# Altium PCB FRONT-UNIT-3.2-WIDE.PcbDoc
Units mm, origin at the board's own origin, x right, y up, seen from the top; angles counter-clockwise.
Board outline 200 x 77.14 mm, 2 copper layers (Top Layer, Top, Bottom Layer, Bottom); 97 components, 83 nets, 412 pads, 119 vias.
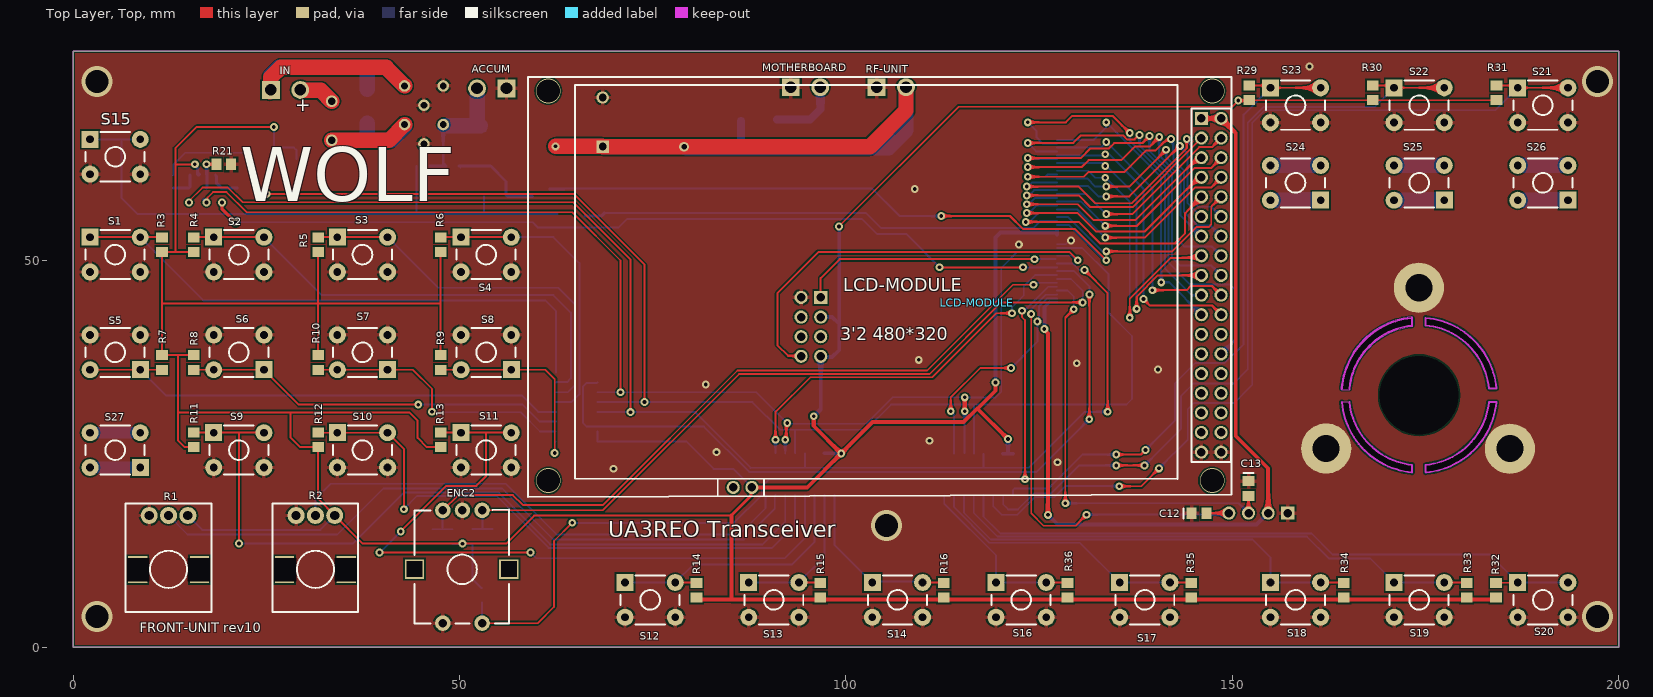
[diagram p0: Top Layer, Top view]
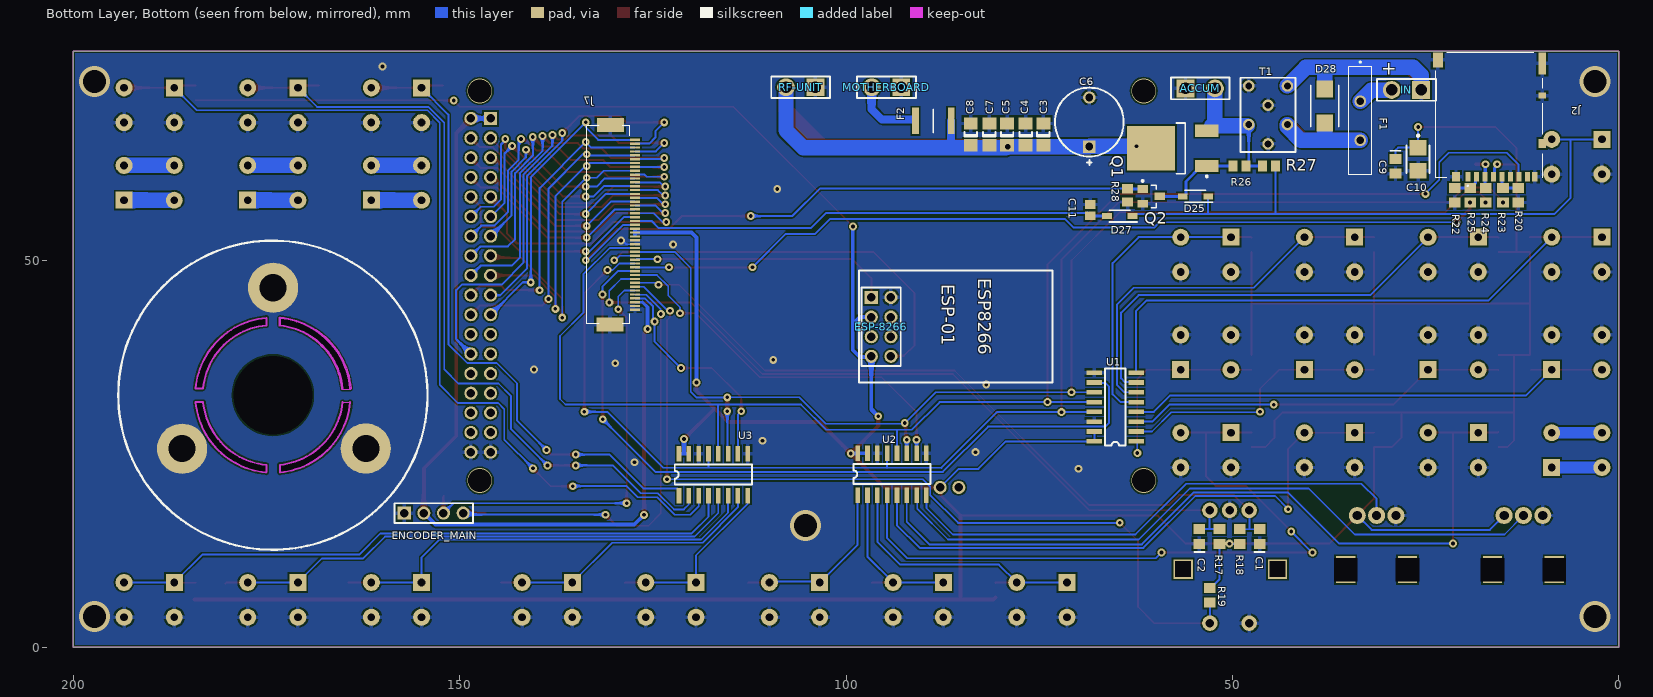
[diagram p1: Bottom Layer, Bottom view, seen from below]

## Layer stack, top to bottom
Top Solder, Top Mask: solder mask 0.0102, Solder Resist, Dk 3.5
Top Layer, Top: signal copper 0.0356
Dielectric 1: dielectric 0.32, FR-4, Dk 4.8
Bottom Layer, Bottom: signal copper 0.0356
Bottom Solder, Bot Mask: solder mask 0.0102, Solder Resist, Dk 3.5

## Board outline
0,0 0,75.757 0,77.141 200,77.141 200,0
cut-out: 175.014,22.629 ccw(c174.15,32.625) 184.143,31.726 184.125,31.725 183.175,31.725 cw(c174.15,32.625) 175.023,23.597 175,23.6
cut-out: 164.154,31.723 ccw(c174.15,32.625) 173.244,22.629 173.25,22.65 173.25,23.6 173.248,23.609 cw(c174.15,32.625) 165.135,31.714 165.125,31.725
cut-out: 164.113,33.381 ccw(c164.2,33.475) 164.2,33.347 165.125,33.347 ccw(c165.125,33.475) 165.252,33.475 ccw(c165.125,33.475) 165.252,33.476 ccw(c165.127,33.497) 165.254,33.485 cw(c174.15,32.625) 173.217,41.514 ccw(c173.204,41.641) 173.321,41.591 ccw(c173.225,41.675) 173.352,41.675 173.352,42.6 ccw(c173.225,42.6) 173.281,42.714 ccw(c173.204,42.613) 173.192,42.74 ccw(c174.15,32.625) 164.029,33.513 ccw(c164.155,33.502)
cut-out: 174.999,41.661 cw(c174.15,32.625) 183.184,33.494 183.2,33.475 184.15,33.475 184.151,33.473 ccw(c174.15,32.625) 175.004,42.625 175,42.6

## Design rules (kind name [scope] priority, off if disabled: settings)
BoardOutlineClearance [All] p1: gap=0.2 ignorepadtopadclearanceinfootprint=FALSE except(0.4: Arc-SplitBarrior Arc-SplitContinuation Track-SplitBarrior Track-SplitContinuation SMDPad-SplitBarrior SMDPad-SplitContinuation THPad-SplitBarrior THPad-SplitContinuation Via-SplitBarrior Via-SplitContinuation Fill-SplitBarrior Fill-SplitContinuation Poly-SplitBarrior Poly-SplitContinuation Region-SplitBarrior Region-SplitContinuation Text-SplitBarrior Text-SplitContinuation)
Clearance Zazor [InNetClass('Zazor')] p1: gap=0.6 ignorepadtopadclearanceinfootprint=FALSE
Clearance "Clearance Bottom Layer" [OnLayer('Bottom Layer')] p2: gap=0.2 ignorepadtopadclearanceinfootprint=TRUE
Clearance "Clearance Top Layer" [OnLayer('Top Layer')] p3: gap=0.203 ignorepadtopadclearanceinfootprint=TRUE except(0.254: Arc-Text Track-Text SMDPad-Text THPad-Text Via-Text Fill-Text Poly-Text Region-Text Text-Text)
Clearance [All] p4: gap=0.2 ignorepadtopadclearanceinfootprint=FALSE except(0.089: Arc-Arc Arc-Track Arc-SMDPad Track-Track Track-SMDPad SMDPad-SMDPad; 0.127: Arc-Via Track-Via SMDPad-Via THPad-Via Via-Via; 0.254: Arc-Text Track-Text SMDPad-Text THPad-Text Via-Text Fill-Text Poly-Text Region-Text Text-Text)
ComponentClearance [All] p1: gap=0 collisioncheckmode=3 verticalgap=0 showdistances=FALSE
HoleSize [All] p1: absolutevalues=TRUE maxlimit=21 minlimit=0.486 maxpercent=80.000 minpercent=20.000
MinimumAnnularRing [All] p1: minimumring=0.076
MinimumSolderMaskSliver [All] p1: minsoldermaskwidth=0.01
PolygonConnect PolygonConnect_1 [All] p1: thpad.connectstyle=Relief thpad.reliefconductorwidth=0.508 thpad.reliefentries=4 thpad.polygonreliefangle="90 Angle" thpad.airgapwidth=0.254 smdpad.connectstyle=Relief smdpad.reliefconductorwidth=0.508 smdpad.reliefentries=4 smdpad.polygonreliefangle="90 Angle" smdpad.airgapwidth=0.254 via.connectstyle=Direct via.reliefconductorwidth=0.508 via.reliefentries=4 via.polygonreliefangle="90 Angle" via.airgapwidth=0.254
RoomDefinition FRONT-UNIT-WIDE [InComponentClass('FRONT-UNIT-WIDE')] p1: confinementstyle=ConfineIn formatcopy=TRUE lockcomponents=FALSE outline 0,-1.25 199.694,-1.25 199.694,76.835 0,76.835
RoutingCorners [All] p1: cornerstyle=Round minsetback=2.54 maxsetback=2.54
RoutingVias [All] p1: holewidth=0.5 width=1 viastyle="Through Hole" minholewidth=0.2 minwidth=0.45 maxholewidth=1 maxwidth=2
SilkToSilkClearance [All] p1: silktosilkclearance=0.01
SilkToSolderMaskClearance [IsPad] p1: minsilkscreentomaskgap=0.1 clearancetoexposedcopper=TRUE
SolderMaskExpansion [All] p1: expansion=0.102
Width [All] p1: maxlimit=2.54 minlimit=0.15 preferedwidth=0.4
24 further rules are at their usual default settings.

## Components (designator, comment, footprint, x,y, rotation, side; value= is the part's Value field where it differs from the comment)
ACCUM "JX2" JX2 54.165,72.315 r180 bottom value=13.8V
C1 "100n" CAP_0805 46.485,14.13 r90 bottom
C2 "100n" CAP_0805 54.273,14.13 r90 bottom
C3 "1uF" CAP_1206 74.459,66.37 r90 bottom
C4 "100n" CAP_1206 76.759,66.37 r90 bottom
C5 "1n" CAP_1206 79.159,66.37 r90 bottom
C6 "1000uF" CAP250RP 68.516,67.418 r90 bottom
C7 "470pF" CAP_1206 81.459,66.37 r90 bottom
C8 "120pF" CAP_1206 83.859,66.37 r90 bottom
C9 "100n" CAP_0805 28.906,62.45 r270 bottom
C10 "22uF" EEEFC_sizeB 25.975,63.55 r270 bottom
C11 "8.2n" CAPC2013X94X50LL20T25 68.389,56.567 r270 bottom
C12 "10n" CAP_0805 145.478,17.324 r0 top
C13 "10n" CAP_0805 152.082,20.753 r270 top
D25 "1n4148w" SOD3716X135N 54.8,58.345 r0 bottom
D27 "1n4148w" SOD3716X135N 64.579,55.805 r0 bottom
D28 "SM6T15A" SMBJ36CATR 38.036,70.029 r90 bottom
ENC2 "PEC12" PEC12 50.275,10.425 r0 top
ENCODER_MAIN "OPTICAL ENCODER" 644456-4 153.349,18.005 r180 bottom
ESP-8266 "ESP-01 ESP8266" "ESP-01 ESP8266" 85.788,41.51 r270 bottom
F1 "RUEF400" RUEF400 33.464,68.124 r270 bottom
F2 "MF-MSMF110_16-2" FUSC4632X85N 88.709,68.124 r0 bottom
IN "JX2" JX2 27.495,72.117 r0 bottom value=13.8V
J2 "DM3AT-SF-PEJM5" DM3ATSFPEJM5 16.75,68.3 r0 bottom
J7 "FPC-45P-0.5mm" FH12S45S05SH60 127.952,54.662 r90 bottom
LCD-MODULE "ILI9481 480*320 3'2" LCD-MODULE-3.2-480-320 59.88,73.77 r0 top
MOTHERBOARD "JX2" JX2 94.764,72.47 r0 bottom value=13.8V
Q1 "IRFR9024NPBF" ONSC-DPAK-3-369C-01_V 57.721,64.568 r0 bottom
Q2 "BSS123" FAIR-SOT23-3_V 60.515,58.345 r270 bottom
R1 "ptv09a-4225f-b102" PTV09 12.334,11.591 r180 top value="AF GAIN 1k"
R2 "ptv09a-4225f-b102" PTV09 31.332,11.591 r180 top value="SHIFT 1k"
R3 "4.7k" RES_0805 11.5,52.1 r270 top
R4 "4.7k" RES_0805 15.594,52.1 r270 top
R5 "4.7k" RES_0805 31.696,52.1 r270 top
R6 "4.7k" RES_0805 47.549,52.1 r270 top
R7 "4.7k" RES_0805 11.5,36.857 r90 top
R8 "4.7k" RES_0805 15.594,36.857 r90 top
R9 "4.7k" RES_0805 47.549,36.857 r90 top
R10 "4.7k" RES_0805 31.696,36.857 r90 top
R11 "4.7k" RES_0805 15.594,26.85 r270 top
R12 "4.7k" RES_0805 31.696,26.85 r270 top
R13 "4.7k" RES_0805 47.549,26.85 r270 top
R14 "4.7k" RES_0805 80.659,7.4 r270 top
R15 "4.7k" RES_0805 96.659,7.4 r270 top
R16 "4.7k" RES_0805 112.659,7.4 r270 top
R17 "4.7k" RES_0805 51.677,14.33 r270 bottom
R18 "4.7k" RES_0805 49.081,14.331 r270 bottom
R19 "4.7k" RES_0805 52.921,6.741 r90 bottom
R20 "3.3k" RES_0805 13,58.5 r90 bottom
R21 "3.3k" RES_0805 19.5,62.5 r180 top
R22 "3.3k" RES_0805 21.25,58.5 r90 bottom
R23 "0" RES_0805 15,58.5 r270 bottom
R24 "0" RES_0805 17.25,58.5 r270 bottom
R25 "0" RES_0805 19.25,58.5 r270 bottom
R26 "30k" RESC2013X60X40NL20T25 49.085,62.282 r180 bottom
R27 "30k" RESC2013X60X40NL20T25 45.275,62.282 r0 bottom
R28 "30k" RESC2013X60X40NL20T25 63.563,58.472 r90 bottom
R29 "4.7k" RES_0805 152.159,71.741 r270 top
R30 "4.7k" RES_0805 168.159,71.741 r270 top
R31 "4.7k" RES_0805 184.159,71.741 r270 top
R32 "4.7k" RES_0805 184.1,7.4 r270 top
R33 "4.7k" RES_0805 180.3,7.4 r270 top
R34 "4.7k" RES_0805 164.4,7.4 r270 top
R35 "4.7k" RES_0805 144.659,7.4 r270 top
R36 "4.7k" RES_0805 128.659,7.4 r270 top
RF-UNIT "JX2" JX2 105.859,72.47 r0 bottom value=13.8V
S1 "PTS645SK50LFS" PTS645SK50LFS 5.441,50.816 r0 top
S2 "PTS645SK50LFS" PTS645SK50LFS 21.441,50.816 r0 top
S3 "PTS645SK50LFS" PTS645SK50LFS 37.441,50.816 r0 top
S4 "PTS645SK50LFS" PTS645SK50LFS 53.441,50.816 r0 top
S5 "PTS645SK50LFS" PTS645SK50LFS 5.441,38.166 r180 top
S6 "PTS645SK50LFS" PTS645SK50LFS 21.441,38.166 r180 top
S7 "PTS645SK50LFS" PTS645SK50LFS 37.441,38.166 r180 top
S8 "PTS645SK50LFS" PTS645SK50LFS 53.441,38.166 r180 top
S9 "PTS645SK50LFS" PTS645SK50LFS 21.441,25.515 r0 top
S10 "PTS645SK50LFS" PTS645SK50LFS 37.441,25.515 r0 top
S11 "PTS645SK50LFS" PTS645SK50LFS 53.441,25.515 r0 top
S12 "PTS645SK50LFS" PTS645SK50LFS 74.659,6.141 r0 top
S13 "PTS645SK50LFS" PTS645SK50LFS 90.659,6.141 r0 top
S14 "PTS645SK50LFS" PTS645SK50LFS 106.659,6.141 r0 top
S15 "PTS645SK50LFS" PTS645SK50LFS 5.442,63.475 r0 top value=PWR
S16 "PTS645SK50LFS" PTS645SK50LFS 122.659,6.141 r0 top
S17 "PTS645SK50LFS" PTS645SK50LFS 138.659,6.141 r0 top
S18 "PTS645SK50LFS" PTS645SK50LFS 158.159,6.141 r0 top
S19 "PTS645SK50LFS" PTS645SK50LFS 174.159,6.141 r0 top
S20 "PTS645SK50LFS" PTS645SK50LFS 190.159,6.141 r0 top
S21 "PTS645SK50LFS" PTS645SK50LFS 190.159,70.141 r0 top
S22 "PTS645SK50LFS" PTS645SK50LFS 174.159,70.141 r0 top
S23 "PTS645SK50LFS" PTS645SK50LFS 158.159,70.141 r0 top
S24 "PTS645SK50LFS" PTS645SK50LFS 158.159,60.1 r180 top
S25 "PTS645SK50LFS" PTS645SK50LFS 174.159,60.1 r180 top
S26 "PTS645SK50LFS" PTS645SK50LFS 190.159,60.1 r180 top
S27 "PTS645SK50LFS" PTS645SK50LFS 5.442,25.515 r180 top
T1 "BNX016-01" TRANSF_ICORE 45.402,68.886 r270 bottom
U1 "MCP3008-I/SL" MCP3008-I/SL 65.159,31.096 r0 bottom
U2 "MCP3008-I/SL" MCP3008-I/SL 94.043,22.404 r90 bottom
U3 "MCP3008-I/SL" MCP3008-I/SL 117.159,22.341 r90 bottom

## Footprints (in the part's own frame and the unit in brackets; to place one, negate y for a bottom-side part, rotate by r counter-clockwise, add the part's x,y. Pads: shape width x height; smd on the part's side, far side on the other; paste and mask are expansions set on the pad)
644456-4 [mm]
  rect 1.7x1.7 hole 1.1: 1(-3.81,-0.635)
  round 1.7 hole 1.1: 2(-1.27,-0.635) 3(1.27,-0.635) 4(3.81,-0.635)
  silkscreen extent -5.08,-1.9 5.08,0.64
CAP250RP [mm]
  rect 1.6x1.6 hole 1: 1(-2.631,0)
  round 1.6 hole 1: 2(3.719,0)
  silkscreen extent -4.99,-4.45 4.99,4.45
CAP_0805 [mm]
  rect 1.3x1.5 smd: 1(-0.75,0) 2(1.15,0)
  silkscreen extent -1.8,-0.65 -1.8,0.65
CAP_1206 [mm]
  rect 1.6x1.8 smd: 1(-1.4,0) 2(1.4,0)
  silkscreen extent -0.3,-0.8 0.3,0.8
CAPC2013X94X50LL20T25 [mm] "Chip Capacitor, 2-Leads, Body 2.01x1.25mm, IPC High Density"
  rect 1.15x1.35 smd: 1(-0.725,0) 2(0.725,0)
  body extent -1.1,-0.72 1.1,0.72, height 0.94
DM3ATSFPEJM5 [mm]
  rect 0.7x1.2 smd: 1(2.775,7.412) 2(1.675,7.412) 3(0.575,7.412) 4(-0.525,7.412) 5(-1.625,7.412) 6(-2.725,7.412) 7(-3.825,7.412) 8(-4.925,7.412) MP2(-5.875,7.412)
  rect 1x1.2 smd: MP1(4.325,7.412) MP3(-6.825,3.112)
  rect 1x0.8 smd: MP4(-6.825,-3.087)
  rect 1x2.8 smd: MP5(-6.825,-7.237)
  rect 1.3x1.9 smd: MP6(6.675,-7.688)
  silkscreen extent -6.93,-8.64 6.93,8.64, body extent -7.24,-8.64 7.19,7.94, height 1.93
EEEFC_sizeB [mm]
  rect 2x2.2 smd: 1(-1.1,0) 2(1.9,0)
  silkscreen extent -2.9,-1.5 2.2,1.5
"ESP-01 ESP8266" [mm]
  round 1.7 hole 1.1: 1(-3.76,-8.4) 2(-1.22,-8.4) 3(1.32,-8.4) 4(3.86,-8.4) 6(-1.22,-10.94) 7(1.32,-10.94) 8(3.86,-10.94)
  rect 1.7x1.7 hole 1.1: 5(-3.76,-10.94)
  silkscreen extent -7.25,-12.5 7.25,12.5
FAIR-SOT23-3_V [mm] "SOT23, 3-Leads, Body 2.92x1.3mm, Pitch 0.95mm"
  rect 1x1.4 smd: 1(-0.95,-1.1) 2(0.95,-1.1) 3(0,1.1)
  silkscreen extent -2.12,-1.23 1.46,0.65, body extent -1.46,-0.65 1.46,0.65, height 1.2
FH12S45S05SH60 [mm]
  rect 0.3x1.3 smd: 1(11,-0.65) 2(10.5,-0.65) 3(10,-0.65) 4(9.5,-0.65) 5(9,-0.65) 6(8.5,-0.65) 7(8,-0.65) 8(7.5,-0.65) 9(7,-0.65) 10(6.5,-0.65) 11(6,-0.65) 12(5.5,-0.65) 13(5,-0.65) 14(4.5,-0.65) 15(4,-0.65) 16(3.5,-0.65) 17(3,-0.65) 18(2.5,-0.65) 19(2,-0.65) 20(1.5,-0.65) 21(1,-0.65) 22(0.5,-0.65) 23(0,-0.65) 24(-0.5,-0.65) 25(-1,-0.65) 26(-1.5,-0.65) 27(-2,-0.65) 28(-2.5,-0.65) 29(-3,-0.65) 30(-3.5,-0.65) 31(-4,-0.65) 32(-4.5,-0.65) 33(-5,-0.65) 34(-5.5,-0.65) 35(-6,-0.65) 36(-6.5,-0.65) 37(-7,-0.65) 38(-7.5,-0.65) 39(-8,-0.65) 40(-8.5,-0.65) 41(-9,-0.65) 42(-9.5,-0.65) 43(-10,-0.65) 44(-10.5,-0.65) 45(-11,-0.65)
  rect 1.8x3.5 smd: 46(-12.9,2.6) 47(12.9,2.54)
  silkscreen extent -12.8,0 12.8,5.6, body extent -13.62,-5.6 13.62,1.27, height 2.1
FUSC4632X85N [mm]
  rect 0.85x3.43 smd: 1(-2.3,0) 2(2.3,0)
  silkscreen extent 0,-1.52 0,1.52, body extent -2.27,-1.62 2.27,1.62, height 0.85
JX2 [mm]
  rect 2.3x2.3 hole 1.5: 1(-1.905,0)
  round 2.3 hole 1.5: 2(1.905,0)
  silkscreen extent -3.81,-1.4 3.81,1.4
LCD-MODULE-3.2-480-320 [mm]
  rect 1.7x1.7 hole 1.1: 1(86.106,-5.334)
  round 1.7 hole 1.1: 2(88.646,-5.334) 3(86.106,-7.874) 4(88.646,-7.874) 5(86.106,-10.414) 6(88.646,-10.414) 7(86.106,-12.954) 8(88.646,-12.954) 9(86.106,-15.494) 10(88.646,-15.494) 11(86.106,-18.034) 12(88.646,-18.034) 13(86.106,-20.574) 14(88.646,-20.574) 15(86.106,-23.114) 16(88.646,-23.114) 17(86.106,-25.654) 18(88.646,-25.654) 19(86.106,-28.194) 20(88.646,-28.194) 21(86.106,-30.734) 22(88.646,-30.734) 23(86.106,-33.274) 24(88.646,-33.274) 25(86.106,-35.814) 26(88.646,-35.814) 27(86.106,-38.354) 28(88.646,-38.354) 29(86.106,-40.894) 30(88.646,-40.894) 31(86.106,-43.434) 32(88.646,-43.434) 33(86.106,-45.974) 34(88.646,-45.974) 35(86.106,-48.514) 36(88.646,-48.514) 37(25.527,-53.086) 38(27.943,-53.086)
  silkscreen extent -1,-54.3 90,0
MCP3008-I/SL [mm]
  rect 2x0.6 smd: 1(-2.7,4.445) 2(-2.7,3.175) 3(-2.7,1.905) 4(-2.7,0.635) 5(-2.7,-0.635) 6(-2.7,-1.905) 7(-2.7,-3.175) 8(-2.7,-4.445) 9(2.7,-4.445) 10(2.7,-3.175) 11(2.7,-1.905) 12(2.7,-0.635) 13(2.7,0.635) 14(2.7,1.905) 15(2.7,3.175) 16(2.7,4.445)
  silkscreen extent -1.3,-5 1.3,5
ONSC-DPAK-3-369C-01_V [mm] "DPAK, 3-Leads, Body 6.54x6.095mm, Pitch 2.29mm"
  rect 3x1.6 smd: 1(-4.4,2.29) 3(-4.4,-2.29)
  rect 6.2x5.8 smd: 4(2.8,0)
  silkscreen extent -4.52,-3.27 -0.45,3.76, body extent -1.6,-3.27 4.49,3.27, height 2.38
PEC12 [mm]
  round 2 hole 1.1: 1(-2.44,-7.302) 2(2.64,-7.302) 3(2.64,7.302) 4(0.1,7.302) 5(-2.44,7.302)
  rect 2.5x2.5 hole 2 square: 6(-6.1,-0.318) 7(6.1,-0.318)
  silkscreen extent -6.12,-7.32 6.12,7.38
PTS645SK50LFS [mm]
  rect 2.2x2.2 hole 1: 1(-3.25,2.25)
  round 2.2 hole 1: 2(3.25,2.25) 3(3.25,-2.25) 4(-3.25,-2.25)
  silkscreen extent -3.81,-3.17 3.81,3.18
PTV09 [mm]
  round 2.2 hole 1.2: 1(-2.515,-5.465) 2(-0.015,-5.465) 3(2.485,-5.465)
  rect 2.5x3.5 hole 3 square: 4(-4.015,1.535) 5(3.985,1.535)
  silkscreen extent -5.56,-7.03 5.56,7.03
RES_0805 [mm]
  rect 1.3x1.5 smd: 1(-0.95,0) 2(0.95,0)
RESC2013X60X40NL20T25 [mm] "Chip Resistor, 2-Leads, Body 2.00x1.25mm, IPC Medium Density"
  rect 1.2x1.45 smd: 1(-0.85,0) 2(0.85,0)
  body extent -1.1,-0.72 1.1,0.72, height 0.6
RUEF400 [mm]
  round 1.515 hole 1.01: 1(-2.525,0) 2(2.525,0)
  silkscreen extent -7.7,-1.5 7,1.5, body extent -7,-1.5 7,1.5, height 19.1
SMBJ36CATR [mm]
  rect 2.2x2.15 smd: 1(-2.2,0) 2(2.2,0)
  silkscreen extent -2.68,-1.81 2.68,1.81, body extent -3.09,-1.81 3.09,1.81, height 2.75
SOD3716X135N [mm]
  rect 1.25x0.75 smd: 1(-1.65,0) 2(1.65,0)
  silkscreen extent -2.27,-0.77 1.35,0.77, body extent -1.85,-0.78 1.85,0.77, height 1.35
TRANSF_ICORE [mm]
  round 1.5 hole 0.9: LCG1(-1.25,0.01) LCG2(3.75,0.01) LCG3(-3.75,-2.49) LCP(1.25,-2.49) P(1.25,2.51) PSG(-3.75,2.51)
  silkscreen extent -4.81,-3.54 4.81,3.54

## Part data
C1 C2 C9 C12 C13: library part CAP_0805, "CAP_0805"
C3 C4 C5 C7 C8: library part CAP_1206, "CAP_1206"
C6: library part CAP250RP, "CAP250RP"
C10: library part EEEFC_sizeB, "EEEFC_sizeB"
C11: library part CMP-2007-04444-1, "CAP_1206", Manufacturer="AVX Interconnect / Elco", Part Number=08055C822KAT2A
D25 D27: "Diode", Manufacturer_Name=Vishay, Datasheet Link=http://www.vishay.com/docs/85748/1n4148w.pdf, Height=1.35mm, Manufacturer_Part_Number=1n4148w
D28: "Diode", Manufacturer_Name=STMicroelectronics, Mouser Part Number=511-SM6T15A, RS Part Number=4864915P, Allied_Number=70390432, Allied Price/Stock=http://www.alliedelec.com/stmicroelectronics-sm6t15a/70390432/, Datasheet Link=http://www.st.com/web/en/resource/technical/document/datasheet/CD00000725.pdf, Height=2.65mm, Manufacturer_Part_Number=SM6T15A, Mouser Price/Stock=https://www.mouser.com/Search/Refine.aspx?Keyword=511-SM6T15A, RS Price/Stock=http://uk.rs-online.com/web/p/products/4864915P
ENCODER_MAIN: library part 644456-4
F1: "Fuse", Manufacturer_Name=LITTELFUSE, Mouser Part Number=650-RUEF400, RS Part Number=5176837P, Datasheet Link=https://componentsearchengine.com/Datasheets/1/RUEF400.pdf, Height=19mm, Manufacturer_Part_Number=RUEF400, Mouser Price/Stock=https://www.mouser.co.uk/ProductDetail/Littelfuse/RUEF400?qs=hv6pn79dJPQHuFVnpNF%2FDg%3D%3D, RS Price/Stock=http://uk.rs-online.com/web/p/products/5176837P
F2: "Fuse", Manufacturer_Name=Bourns, Manufacturer_Part_Number=MF-MSMF110/16-2, Mouser Part Number=652-MF-MSMF110/16-2, RS Part Number=6478207P, Allied_Number=70153434, Allied Price/Stock=https://www.alliedelec.com/bourns-mf-msmf110-16-2/70153434/, Datasheet Link=https://componentsearchengine.com/Datasheets/2/MF-MSMF110_16-2.pdf, Height=0.85mm, Mouser Price/Stock=https://www.mouser.co.uk/ProductDetail/Bourns/MF-MSMF110-16-2?qs=wksszfECgvir54ST3ixUHA%3D%3D, RS Price/Stock=http://uk.rs-online.com/web/p/products/6478207P
J2: "Connector", Manufacturer_Name=HRS(Hirose), Datasheet Link=https://datasheet.lcsc.com/szlcsc/Hirose-HRS-DM3AT-SF-PEJM5_C114218.pdf, Height=1.83mm, Manufacturer_Part_Number=DM3AT-SF-PEJM5
J7: library part FH12S-45S-0.5SH_55_, "Connector", Manufacturer_Name=Hirose, Manufacturer_Part_Number=FH12S-45S-0.5SH(55), Mouser Part Number=798-FH12S-45S-05SH55, RS Part Number=1620942, Datasheet Link=https://www.hirose.com/product/en/download_file/key_name/FH12S-45S-0.5SH%2855%29/category/Drawing%20(2D)/doc_file_id/43881/?file_category_id=6&item_id=05860665055&is_series=, Height=2mm, Mouser Price/Stock=https://www.mouser.co.uk/ProductDetail/Hirose-Connector/FH12S-45S-05SH55?qs=0N%252BVULUZFj%252BE0LA99Ny0NA%3D%3D, RS Price/Stock=http://uk.rs-online.com/web/p/products/1620942
LCD-MODULE: library part LCD-MODULE_3'2_480х320, "LCD-MODULE_3'2_480х320"
Q1: library part CMP-1058-00387-1, "IRFR9024NPBF, Транзистор, Р-канал 55В 11А", Manufacturer="On Semiconductor", Package Type="DPAK-3, IPAK-4", PartNumber=NTD2955G, Channel Polarity="P Channel", Ciss Typ (pF)=500, ComponentLink1Description="Manufacturer URL", ComponentLink1URL=http://www.onsemi.com/, ComponentLink2Description=Datasheet, ComponentLink2URL=http://www.onsemi.cn/pub_link/Collateral/NTD2955-D.PDF, ComponentLink3Description="Package Specification", ComponentLink3URL=http://www.onsemi.cn/pub_link/Collateral/369C.PDF, Configuration=Single, Coss Typ (pF)=150, Crss Typ (pF)=50, DatasheetVersion="Rev. 13", ID Max (A)=12, Mounting Technology="Surface Mount", PackageDescription="3-Pin Flange Mount, Body 6.54 x 6.095 mm, Pitch 2.29 mm", PackageReference=DPAK-3-369C-01, PackageVersion="Rev. E, 02/2014", Packing="Tape and Reel", PD Max (W)=55, Qrr Typ (nC)=100, RoHS=Pb-Free, V(BR)DSS Min (V)=60, VGS(th) Max (V)=4, VGS Max (V)=20
Q2: library part CMP-2000-04934-1, "N-Channel Logic Level Enhancement Mode Field Effect Transistor, 1.7 V, -55 to 150 degC, 3-Pin SOT-23, RoHS, Tape and Reel", Manufacturer=Fairchild, Maximum Continuous Drain Current=0.17A, Maximum Drain Source Voltage=100V, Maximum Gate Source Voltage=±20V, Operating Temperature=-55to150degC, Package=3SOT-23, Package Description="3-Pin Small Outline Transistor, Body 2.92 x 1.325 mm, Pitch 0.95 mm", Package Reference=SOT23-3, Package Version="Rev. 12, 03/2016", Category=MOSFET, Channel Mode=Enhancement, Channel Type=N, Datasheet URL=https://www.fairchildsemi.com/datasheets/BS/BSS123.pdf, Datasheet Version=Jun-03, Manufacturer URL=https://www.fairchildsemi.com/, Mounting=SurfaceMount, Package URL=http://www.fairchildsemi.com/dwg/MA/MA03D.pdf, Packaging=Tape&Reel, Rad Hard=No, RDS-on=6000@10VmOhm, Typical Fall Time=2.4ns, Typical Rise Time=9ns, Typical Turn-Off Delay Time=17ns, Typical Turn-On Delay Time=1.7ns
R1 R2: library part PTV09, "Adjustable Resistor PTV09"
R3 R4 R5 R6 R7 R8 R9 R10 R11 R12 R13 R14 R15 R16 R17 R18 R19 R20 R21 R22 R23 R24 R25 R29 R30 R31 R32 R33 R34 R35 R36: library part RES_0805, "RES_0805"
R26 R27 R28: library part CMP-2001-00626-1, "RES_0805", Manufacturer=Panasonic, Part Number=ERA-6AEB303V
S1: LCSC Part #=test
T1: library part TRANSF_ICORE
ENC2: FULLNAME="Выключатель замыкающий с приводом нажатием кнопки"

## Free pads (board coordinates)
  round 6.5 hole 3.5: 2(162.125,25.725) 2(174.125,46.525) 2(185.9,25.7)
  round 0.1 hole 10.2: 4(174.15,32.625)

## Via types
v1: diameter 1.016, hole 0.486, Top Layer, Top to Bottom Layer, Bottom, tented both sides, 109 vias
v2: diameter 4, hole 3, Top Layer, Top to Bottom Layer, Bottom, 5 vias
v3: diameter 3.2, hole 3, Top Layer, Top to Bottom Layer, Bottom, 4 vias
v4: diameter 1.27, hole 0.711, Top Layer, Top to Bottom Layer, Bottom, tented both sides, 1 vias

## Nets (pads, with @x,y where several pads share a name; then routed paths per layer and width w, separated by ;. In a path a pad name is that pad's centre, name@x,y a point inside that pad or via, vN(x,y) a via of type N, cw(c..) or ccw(c..) an arc to the next point about the centre after c; other vN are vias at no path point)
+3V3: C9.1 C10.1 ESP-8266.6 ESP-8266.8 J2.4 J7.24 J7.25 J7.26 LCD-MODULE.38 R1.1 R2.1 R3.2 R4.2 R5.2 R6.2 R7.2 R8.2 R9.2 R10.2 R11.2 R12.2 R13.2 R14.2 R15.2 R16.2 R17.2 R18.2 R19.2 R29.2 R30.2 R31.2 R32.2 R33.2 R34.2 R35.2 R36.2 U1.15 U1.16 U2.15 U2.16 U3.15 U3.16 | length 620.6
  Top Layer, Top w0.23: v1(99.088,54.451) 114.577,69.941 149.959,69.941 v1(150.759,70.741) 152.109,70.741 R29.2 R30.2 R31.2
  Top Layer, Top w0.254: R11.2 14.45,25.9 13.547,26.803 13.547,30.375 ; R8.2 13.547,37.807 ; R4.2 13.225,51.15 ; v1(15.75,62.5) 13.225,62.5 ; v1(25.975,67.325) 16,67.325 13.225,64.55 13.225,62.5 ; R10.2 31.696,44.478 ; R5.2 31.696,44.478 ; R13.2 45.775,25.9 44.575,27.1 44.575,29.325 43.5,30.4 28.1,30.4 ; R9.2 47.549,44.478 ; R6.2 47.549,44.478 ; 85.15,17.05 59.65,17.05 56.016,13.416 v1(50.389,13.416) 37.487,13.416 R2.1 31.696,19.207 R12.2 29.375,25.9 28.1,27.175 28.1,30.4 ; 11.5,44.478 R3.2 13.225,51.15 ; 11.5,44.478 R7.2 13.547,37.807 ; 11.5,44.478 31.696,44.478 ; 13.225,51.15 13.225,62.5 ; 13.547,30.375 13.547,37.807 ; 13.547,30.375 13.572,30.4 28.1,30.4 ; 31.696,44.478 47.549,44.478
  Top Layer, Top w0.4: 85.15,17.05 85.175,17.075 87.7,19.6 87.7,20.561 LCD-MODULE.38
  Top Layer, Top w0.5: R14.2 80.9,6.21 85.175,6.21 85.175,17.075 ; 85.175,6.191 R32.2@184.325,6.191 ; LCD-MODULE.38 94.991,20.684 v1(99.377,25.071) ; v1(95.821,29.897) 95.821,28.627 v1(99.377,25.071) ; v1(119.332,34.273) 119.332,33.193 117.054,30.915 116.985,30.915 ; v1(120.959,26.941) 116.985,30.915 ; v1(99.377,25.071) 103.447,29.141 115.211,29.141 116.985,30.915
  Bottom Layer, Bottom w0.254: R1.1 16.705,15.2 31.991,15.2 R2.1 ; v1(25.975,67.325) C10.1 28.55,64.65 28.906,64.294 C9.1 ; R18.2 R17.2 51.677,8.79 52.775,7.691 R19.2 ; U1.15 U1.16 79.311,26.651 82.863,23.1 85.408,23.1 LCD-MODULE.38@87.681,20.827
  Bottom Layer, Bottom w0.4: v1(15.75,62.5) 15.75,62.333 16.075,62.008 16.075,61.238 16.225,61.088 J2.4@16.34,61.203
  Bottom Layer, Bottom w0.5: v1(95.821,29.897) 96.728,30.804 96.728,37.337 96.964,37.573 98.206,37.573 99.123,38.491 99.123,41.813 ; ESP-8266.6@96.964,42.73 98.206,42.73 99.123,41.813 ; U2.15 U2.16 98.521,25.071 v1(99.377,25.071) ; v1(99.088,54.451) 99.123,54.416 99.123,41.813 ; v1(119.332,34.273) 119.332,53.027 119.967,53.662 J7.25 ; U3.15 120.969,25.041 ; v1(120.959,26.941) 120.959,25.051 120.969,25.041 ; U3.16 120.969,25.041 ; 127.302,53.392 J7.25 ; 127.302,53.9 J7.25
+5: ENCODER_MAIN.2 J7.43 LCD-MODULE.1 LCD-MODULE.2 | length 117.3
  Top Layer, Top w0.5: v1(125.666,41.2) 125.666,41.06 126.124,40.602 v1(126.124,17.14) ; LCD-MODULE.1 LCD-MODULE.2@148.458,68.436 ; LCD-MODULE.2@148.399,68.495 LCD-MODULE.2@148.458,68.436 ; LCD-MODULE.2@148.492,68.402 LCD-MODULE.2@148.458,68.436 ; LCD-MODULE.2 LCD-MODULE.2@148.458,68.436 ; LCD-MODULE.2@148.619,68.344 150.431,66.531 150.431,27.357 154.619,23.169 ENCODER_MAIN.2
  Bottom Layer, Bottom w0.3: 126.323,44.651 J7.43@127.291,44.651
  Bottom Layer, Bottom w0.4: 125.666,43.994 126.323,44.651
  Bottom Layer, Bottom w0.5: v1(125.666,41.2) 125.666,43.994 ; v1(126.124,17.14) 127.394,15.87 153.119,15.87 ENCODER_MAIN.2 ; LCD-MODULE.1 LCD-MODULE.2
+12: C3.1 C4.1 C5.1 C6.1 C7.1 C8.1 F2.1 Q1.4 RF-UNIT.2 | length 107.2
  Top Layer, Top w2: v1(62.42,64.822) 68.482,64.822 C6.1 68.533,64.77 v4(79.059,64.77) 103.079,64.77 107.764,69.455 RF-UNIT.2
  Bottom Layer, Bottom w0.254: C5.1@78.976,64.787 C5.1
  Bottom Layer, Bottom w0.381: 86.296,64.62 86.409,64.733 ; 92.124,65.005 92.509,64.62
  Bottom Layer, Bottom w1: 86.409,64.733 F2.1
  Bottom Layer, Bottom w1.6: C7.1@81.459,64.62 C7.1 ; C8.1 C8.1@83.967,64.62
  Bottom Layer, Bottom w2: v1(62.42,64.822) 68.482,64.822 C6.1 74.459,64.787 76.759,64.787 C5.1@78.976,64.787 ; v4(79.059,64.77) 79.347,64.62 81.459,64.62 83.967,64.62 86.296,64.62 92.509,64.62 105.509,64.62 107.764,66.875 RF-UNIT.2
AD1_CS: J7.35 U1.10 | length 99.9
  Top Layer, Top w0.254: v1(131.468,29.516) 131.488,29.536 131.488,45.624 v1(131.508,45.645)
  Bottom Layer, Bottom w0.254: U1.10 67.763,34.175 66.4,34.175 66,33.775 66,28.994 66.442,28.552 81.623,28.552 87.465,22.71 124.662,22.71 v1(131.468,29.516) ; J7.35 128.602,48.662 129.507,48.662 131.508,46.661 v1(131.508,45.645)
AD2_CS: J7.36 U2.10 | length 50.2
  Top Layer, Top w0.23: v1(90.868,26.849) 90.868,30.405 95.404,34.941 111.159,34.941 119.45,43.232 v1(121.475,43.232)
  Bottom Layer, Bottom w0.23: U2.10 v1(90.868,26.849) ; v1(121.475,43.232) 121.475,43.994 122.999,45.518 122.999,46.705 124.456,48.162 J7.36
AD3_CS: J7.42 U3.10 | length 29.1
  Top Layer, Top w0.23: v1(113.559,30.541) 113.559,32.341 117.359,36.141 v1(121.359,36.141)
  Bottom Layer, Bottom w0.23: v1(113.559,30.541) 113.984,30.116 U3.10
  Bottom Layer, Bottom w0.254: v1(121.359,36.141) 124.759,39.541 v1(124.759,42.141) 124.959,42.341 124.959,44.098 126.023,45.162 J7.42
CLK: J7.33 R23.2 U1.13 U2.13 U3.13 | length 180.8
  Top Layer, Top w0.23: v1(15,57.55) 15,57.75 16.75,59.5 20,59.5 21.926,57.574 64.701,57.574 72.125,50.15 72.125,30.475 v1@72.1,30.45
  Top Layer, Top w0.254: v1(130.873,48.82) 133.856,45.837 v1(133.856,30.47)
  Bottom Layer, Bottom w0.23: 87.65,23.225 94.678,23.225 117.759,23.225 ; U3.13 117.794,23.26 117.759,23.225 ; J7.33 128.602,49.662 129.352,49.662 130.194,48.82 v1(130.873,48.82) ; 130.889,30.47 123.644,23.225 117.759,23.225
  Bottom Layer, Bottom w0.254: U1.13 80.414,30.461 87.65,23.225 ; 94.678,23.226 U2.13 ; 130.889,30.47 v1(133.856,30.47)
  other v1: 72.126,30.427
CPU_PW_HOLD: J7.23 Q2.1 R28.2 | length 84.2
  Top Layer, Top w0.254: v1(112.331,55.805) 121.221,55.805 122.872,54.154 129.603,54.154 v1(133.667,50.09)
  Bottom Layer, Bottom w0.254: R28.2@63.563,59.378 103.353,59.378 106.927,55.805 v1(112.331,55.805) ; J7.23 128.841,54.662 133.413,50.09 v1(133.667,50.09)
  Bottom Layer, Bottom w0.381: Q2.1 63.536,59.295 R28.2
CPU_PW_ON: C11.2 D27.2 J7.22 | length 62.4
  Bottom Layer, Bottom w0.254: C11.2@68.722,56.175 102.6,56.175 104.494,54.281 124.269,54.281 125.15,55.162 J7.22
  Bottom Layer, Bottom w0.381: D27.2 68.352,55.805 C11.2 C11.2@68.722,56.175
E1A: C13.2 ENCODER_MAIN.3 J7.40 | length 56.2
  Top Layer, Top w0.23: v1(128.379,18.65) 128.379,42.643 v1(129.476,43.74)
  Top Layer, Top w0.254: ENCODER_MAIN.3 152.079,19.599 C13.2
  Bottom Layer, Bottom w0.23: J7.40 128.705,46.162 129.476,45.391 v1(129.476,43.74) ; v1(128.379,18.65) 150.799,18.65 ENCODER_MAIN.3
E1B: C12.2 ENCODER_MAIN.4 J7.41 | length 60.4
  Top Layer, Top w0.23: v1(123.959,43.141) 123.959,17.341 125.559,15.741 129.705,15.741 v1(131.119,17.155)
  Top Layer, Top w0.254: C12.2 146.675,17.37 ENCODER_MAIN.4
  Bottom Layer, Bottom w0.23: v1(123.959,43.141) 123.959,43.741 125.848,45.629 127.27,45.629 J7.41 ; v1@131.134,17.14 v1(131.119,17.155) 131.104,17.17 149.339,17.17 ENCODER_MAIN.4
E2A: C2.2 ENC2.3 J7.37 R17.1 | length 99.5
  Top Layer, Top w0.23: ENC2.3 68.527,17.728 86.157,35.357 110.807,35.357 120.078,44.629 v1(130.619,44.629)
  Top Layer, Top w0.254: ENC2.3 ENC2.3@52.992,17.65
  Bottom Layer, Bottom w0.23: J7.37 129.11,47.662 130.619,46.153 v1(130.619,44.629)
  Bottom Layer, Bottom w0.254: R17.1 52.975,15.281 ; ENC2.3 52.975,17.668 52.975,15.281 ; C2.2 52.975,15.281
E2B: C1.2 ENC2.5 J7.38 R18.1 | length 97.8
  Top Layer, Top w0.23: ENC2.5 49.807,19.7 56.9,19.7 58.175,18.425 68.574,18.425 85.967,35.817 110.505,35.817 121.602,46.915 v1(124.269,46.915)
  Bottom Layer, Bottom w0.23: C1.2 47.783,15.281 ; ENC2.5 47.783,17.675 47.783,15.281 ; R18.1 47.783,15.281 ; v1(124.269,46.915) 124.482,46.915 124.729,47.162 J7.38
E2S: ENC2.2 J7.39 R19.1 | length 114.3
  Top Layer, Top w0.23: ENC2.2 60.122,3.123 62.225,5.225 62.225,13.763 v1(64.575,16.113) ; v1(122.759,43.541) 122.759,42.741 123.159,42.341 v1(123.159,21.741)
  Bottom Layer, Bottom w0.23: ENC2.2 52.915,5.786 R19.1 ; v1(64.575,16.113) 64.575,16.275 64.75,16.1 85.5,16.1 89.094,19.694 89.094,20.788 90.047,21.741 v1(123.159,21.741) ; v1(122.759,43.541) 123.054,43.541 126.175,46.662 J7.39
GND: ACCUM.1 C1.1 C2.1 C3.2 C4.2 C5.2 C6.2 C7.2 C8.2 C9.2 C10.2 C11.1 C12.1 C13.1 ENC2.1 ENC2.4 ENCODER_MAIN.1 ESP-8266.1 J2.6 J2.MP1 J2.MP2 J2.MP4 J2.MP5 J2.MP6 J7.27 J7.28 J7.44 J7.45 J7.46 J7.47 LCD-MODULE.35 LCD-MODULE.36 MOTHERBOARD.1 pad.2 Q2.2 R1.3 R2.3 R20.1 R21.1 R22.1 R28.1 RF-UNIT.1 S1.3 S1.4 S2.3 S2.4 S3.3 S3.4 S4.3 S4.4 S5.3 S5.4 S6.3 S6.4 S7.3 S7.4 S8.3 S8.4 S9.3 S9.4 S10.3 S10.4 S11.3 S11.4 S12.3 S12.4 S13.3 S13.4 S14.3 S14.4 S15.3 S15.4 S16.3 S16.4 S17.3 S17.4 S18.3 S18.4 S19.3 S19.4 S20.3 S20.4 S21.3 S21.4 S22.3 S22.4 S23.3 S23.4 T1.LCG1 T1.LCG2 T1.LCG3 U1.9 U1.14 U2.9 U2.14 U3.9 U3.14 | length 2
  Bottom Layer, Bottom w0.23: J7.28 128.415,52.162 128.883,52.63 v1(129.095,52.63)
  other v1: 69.913,23.095 127.359,23.941 83.248,25.254 110.807,26.722 81.851,34.017 140.359,35.941 129.857,36.755 109.41,37.192 122.364,52.122 108.902,59.29 159.959,75.141
  other v2: 3.084,4 197.25,4 105.25,15.75 3.084,73.216 197.25,73.216
MISO: J2.7 J7.29 U1.12 U2.12 U3.12 | length 195.4
  Top Layer, Top w0.23: v1(25.028,58.671) 64.754,58.671 73.94,49.485 73.94,31.685 v1@73.975,31.65
  Bottom Layer, Bottom w0.23: J2.7@12.925,61.088 13,61.163 13,62.5 14.5,64 22,64 23.25,62.75 23.25,60.496 v1@25.052,58.695 ; U1.12 73.938,31.731 87.894,31.731 91.484,28.141 93.408,28.141 ; U2.12 93.408,28.141 ; U3.12 116.559,25.076 116.559,31.421 ; J7.29 128.602,51.662 130.571,51.662 133.975,48.258 133.975,43.305 137,40.28 137,32.125 136.296,31.421 116.559,31.421 ; 93.408,28.141 102.559,28.141 105.839,31.421 116.559,31.421
  other v1: 73.938,31.744
MOSI: J7.30 R24.2 U1.11 U2.11 U3.11 | length 166.7
  Top Layer, Top w0.23: v1(17.25,57.55) 17.4,57.7 17.4,58.205 18.1,58.905 19.845,58.905 22.45,56.3 64.575,56.3 70.825,50.05 v1@70.825,33
  Top Layer, Top w0.254: v1(92.138,26.849) 92.265,26.976 92.265,28.881 v1(92.392,29.008)
  Top Layer, Top w0.381: v1(115.359,30.541) v1(115.359,32.341)
  Bottom Layer, Bottom w0.23: U1.11 70.827,33.001 88.399,33.001 92.47,28.93 102.619,28.93 105.254,31.565 106.055,32.366 115.334,32.366 v1(115.359,32.341) 119.385,32.341 120.094,33.05 120.094,40.658 120.078,40.675 120.078,49.074 122.166,51.162 J7.30
  Bottom Layer, Bottom w0.254: U2.11 v1(92.138,26.849) ; U3.11@115.359,25.146 v1(115.359,30.541)
  Bottom Layer, Bottom w0.4: R24.2@16.846,57.954 v1(17.25,57.55)
  other v1: 70.827,32.999
NetD25_1: D25.1 D27.1 R27.1 S15.1 S15.2 | length 79.8
  Bottom Layer, Bottom w0.254: S15.1 6.275,65.725 ; S15.2 6.275,65.725 ; 44.425,56.098 R27.1 ; 53.15,56.06 D25.1 ; D27.1@62.675,56.059 28.425,56.059 8.366,56.059 6.25,58.175 6.25,65.7 6.275,65.725
NetD25_2: D25.2 Q1.1 Q2.3 R26.1 | length 12.4
  Bottom Layer, Bottom w0.254: R26.1 R26.1@50.119,62.098
  Bottom Layer, Bottom w0.381: R26.1 53.317,62.282 Q1.1 54.021,62.278 56.016,60.283 56.016,58.529 56.2,58.345 D25.2 Q2.3
NetD28_1: D28.1 F1.2 T1.P | length 23
  Top Layer, Top w2: F1.2 40.855,65.599 T1.P
  Bottom Layer, Bottom w2: F1.2 38.036,65.599 ; D28.1 38.036,65.599 ; T1.P 42.892,67.333 41.158,65.599 38.036,65.599
NetD28_2: D28.2 IN.1 T1.PSG | length 44.5
  Top Layer, Top w2: IN.1@25.463,71.863 25.59,71.99 25.59,73.768 26.86,75.038 40.49,75.038 T1.PSG
  Bottom Layer, Bottom w2: IN.1@25.59,71.863 25.59,74.022 26.606,75.038 38.036,75.038 ; D28.2 38.036,75.038 ; T1.PSG 40.49,75.038 38.036,75.038
NetESP-8266_4: ESP-8266.4 J7.31 | length 54.8
  Top Layer, Top w0.254: ESP-8266.4 94.138,37.7 92.519,37.7 91.122,39.097 91.122,45.828 96.419,51.125 128.949,51.125 v1(129.984,50.09)
  Bottom Layer, Bottom w0.254: J7.31 128.602,50.662 129.299,50.662 129.871,50.09 v1(129.984,50.09)
NetESP-8266_5: ESP-8266.5 J7.32 | length 33.9
  Top Layer, Top w0.254: ESP-8266.5 96.728,47.778 99.167,50.217 v1(124.396,50.217)
  Bottom Layer, Bottom w0.254: v1(124.396,50.217) J7.32@127.103,50.217
NetF1_1: F1.1 IN.2 | length 9.3
  Top Layer, Top w2: IN.2 29.458,72.06 32.053,72.06 F1.1
  Bottom Layer, Bottom w2: IN.2 29.458,72.06 32.053,72.06 F1.1
NetF2_2: F2.2 MOTHERBOARD.2 | length 9.1
  Bottom Layer, Bottom w0.381: F2.2@90.982,68.151 F2.2 ; MOTHERBOARD.2 MOTHERBOARD.2@96.697,72.443
  Bottom Layer, Bottom w1: F2.2@91.084,68.278 95.341,68.278 96.697,69.634 MOTHERBOARD.2@96.697,72.443
NetJ2_2: J2.2 R22.2 R25.1 | length 4
  Bottom Layer, Bottom w0.4: J2.2@18.425,61.088 18.575,60.938 18.575,60.025 19.15,59.45 R25.1 R22.2
NetJ2_3: J2.3 R21.2 R24.1 | length 4.4
  Top Layer, Top w0.4: v1(17.25,62.5) R21.2
  Bottom Layer, Bottom w0.4: R24.1 17.325,59.525 17.325,61.088 17.288,61.125 17.288,62.462 v1(17.25,62.5)
NetJ2_5: J2.5 R20.2 R23.1 | length 3.7
  Bottom Layer, Bottom w0.4: R20.2 R23.1 15.125,59.575 J2.5@15.125,61.088
NetJ7_1: J7.1 LCD-MODULE.21 | length 38.3
  Bottom Layer, Bottom w0.254: J7.1 132.062,65.662 133.667,67.267 v1(133.667,67.926) 140.779,60.814 v1(140.779,47.225) 141.797,47.225 LCD-MODULE.21
NetJ7_2: J7.2 LCD-MODULE.19 | length 45.4
  Top Layer, Top w0.254: v1(123.507,67.926) 128.446,67.926 129.281,68.761 134.483,68.761 v1(136.715,66.529)
  Bottom Layer, Bottom w0.254: v1(123.507,67.926) 124.65,66.783 124.65,65.965 125.453,65.162 J7.2 ; v1(136.715,66.529) 136.715,65.52 141.287,60.948 141.287,49.003 144.714,45.576 LCD-MODULE.19
NetJ7_3: J7.3 LCD-MODULE.20 | length 37.9
  Top Layer, Top w0.254: v1(139.636,46.209) 144.081,46.209 144.625,46.753 147.349,46.753 LCD-MODULE.20
  Bottom Layer, Bottom w0.254: J7.3 128.602,64.662 132.943,64.662 v1(133.667,65.386) 139.636,59.417 v1(139.636,46.209)
NetJ7_4: J7.4 LCD-MODULE.26 | length 57
  Top Layer, Top w0.254: v1(123.507,65.259) 129.413,65.259 130.375,66.221 135.842,66.221 136.369,65.694 137.309,65.694 137.689,66.074 137.689,66.229 137.642,66.275 v1(137.985,66.275)
  Bottom Layer, Bottom w0.254: v1(123.507,65.259) 124.605,64.162 J7.4 ; v1(137.985,66.275) 137.985,64.892 141.741,61.136 141.741,49.765 144.567,46.939 149.701,46.939 150.431,46.209 150.431,39.861 LCD-MODULE.26
NetJ7_5: J7.5 LCD-MODULE.22 | length 38.5
  Top Layer, Top w0.254: v1(138.493,45.066) 139.346,44.213 147.349,44.213 LCD-MODULE.22
  Bottom Layer, Bottom w0.254: J7.5 128.602,63.662 133.684,63.662 v1(133.54,63.806) 134.048,63.806 138.493,59.361 v1(138.493,45.066)
NetJ7_6: J7.6 LCD-MODULE.18 | length 45.1
  Top Layer, Top w0.254: v1(123.507,63.298) 130.365,63.298 131.635,64.568 134.029,64.568 134.702,65.24 138.347,65.24 139.039,65.932 139.039,66.148 v1(139.255,66.148)
  Bottom Layer, Bottom w0.254: v1(123.507,63.298) 123.643,63.162 J7.6 ; v1(139.255,66.148) 139.255,64.265 142.195,61.325 142.195,50.422 143.21,49.408 147.235,49.408 LCD-MODULE.18
NetJ7_7: J7.7 LCD-MODULE.17 | length 37.9
  Top Layer, Top w0.254: v1(137.604,43.796) 137.604,45.358 140.362,48.116 LCD-MODULE.17
  Bottom Layer, Bottom w0.254: J7.7 128.602,62.662 133.16,62.662 v1(133.54,62.282) 133.54,62.409 137.604,58.345 v1(137.604,43.796)
NetJ7_8: J7.8 LCD-MODULE.16 | length 43.3
  Top Layer, Top w0.254: v1(123.507,62.132) 130.47,62.132 131.381,63.044 135.634,63.044 137.376,64.786 139.29,64.786 140.309,65.805 140.309,66.021 v1(140.525,66.021)
  Bottom Layer, Bottom w0.254: v1(123.507,62.132) 127.273,62.132 J7.8 ; v1(140.525,66.021) 140.525,63.637 142.811,61.351 142.811,52.813 143.751,51.873 147.309,51.873 LCD-MODULE.16
NetJ7_9: J7.9 LCD-MODULE.15 | length 40.1
  Top Layer, Top w0.254: v1(136.715,42.653) 136.715,45.111 142.004,50.4 145.73,50.4 LCD-MODULE.15
  Bottom Layer, Bottom w0.254: J7.9 128.602,61.662 131.366,61.662 132.27,60.758 v1(133.54,60.758) 133.602,60.758 136.715,57.644 v1(136.715,42.653)
NetJ7_10: J7.10 LCD-MODULE.14 | length 40.7
  Top Layer, Top w0.254: v1(123.507,60.885) 130.746,60.885 131.381,61.52 136.061,61.52 138.839,64.297 140.071,64.297 141.541,65.767 v1(142.049,65.767)
  Bottom Layer, Bottom w0.254: v1(123.507,60.885) 125.793,60.885 126.07,61.162 J7.10 ; v1(142.049,65.767) 142.357,65.459 142.357,63.089 143.719,61.727 143.719,56.339 145.499,54.559 147.163,54.559 LCD-MODULE.14
NetJ7_11: J7.11 LCD-MODULE.13 | length 29.6
  Top Layer, Top w0.254: v1(133.667,59.615) 136.659,59.615 v1(141.414,64.37)
  Bottom Layer, Bottom w0.254: J7.11 128.602,60.662 131.223,60.662 132.27,59.615 v1(133.667,59.615) ; v1(141.414,64.37) 141.414,63.39 143.265,61.539 143.265,55.917 LCD-MODULE.13
NetJ7_12: J7.12 LCD-MODULE.12 | length 42.7
  Top Layer, Top w0.254: v1(123.38,59.615) 130.111,59.615 132.27,57.456 136.956,57.456 144.081,64.581 v1(144.081,65.767)
  Bottom Layer, Bottom w0.254: v1(123.38,59.615) 123.543,59.615 124.09,60.162 J7.12 ; v1(144.081,65.767) 144.081,65.602 144.627,65.056 144.627,57.971 145.594,57.004 147.258,57.004 LCD-MODULE.12
NetJ7_13: J7.13 LCD-MODULE.11 | length 29.4
  Top Layer, Top w0.254: v1(133.667,58.345) 136.659,58.345 v1(143.192,64.878)
  Bottom Layer, Bottom w0.254: J7.13 128.602,59.662 131.334,59.662 132.651,58.345 v1(133.667,58.345) ; v1(143.192,64.878) 144.173,63.897 144.173,57.549 LCD-MODULE.11
NetJ7_14: J7.14 LCD-MODULE.3 | length 31.2
  Top Layer, Top w0.254: v1(123.38,58.472) 130.111,58.472 131.635,56.948 137.09,56.948 145.986,65.844 LCD-MODULE.3
  Bottom Layer, Bottom w0.254: v1(123.38,58.472) 123.642,58.472 124.332,59.162 J7.14
NetJ7_15: J7.15 LCD-MODULE.4 | length 26.4
  Top Layer, Top w0.254: v1(133.667,56.059) 137.024,56.059 145.685,64.719 147.349,64.719 LCD-MODULE.4
  Bottom Layer, Bottom w0.254: J7.15 128.602,58.662 131.064,58.662 v1(133.667,56.059)
NetJ7_16: J7.16 LCD-MODULE.5 | length 31.1
  Top Layer, Top w0.254: v1(123.38,57.329) 129.984,57.329 132.016,55.297 137.477,55.297 145.537,63.356 LCD-MODULE.5
  Bottom Layer, Bottom w0.254: v1(123.38,57.329) 123.642,57.329 124.475,58.162 J7.16
NetJ7_17: J7.17 LCD-MODULE.6 | length 26.2
  Top Layer, Top w0.254: v1(133.54,54.535) 137.65,54.535 145.143,62.028 147.256,62.028 LCD-MODULE.6@148.526,63.298 ; LCD-MODULE.6 LCD-MODULE.6@148.526,63.415
  Bottom Layer, Bottom w0.254: J7.17 128.602,57.662 130.413,57.662 v1(133.54,54.535)
NetJ7_18: J7.18 LCD-MODULE.7 | length 30.8
  Top Layer, Top w0.254: v1(123.38,56.186) 129.984,56.186 132.397,53.773 138.62,53.773 145.664,60.816 LCD-MODULE.7
  Bottom Layer, Bottom w0.254: v1(123.38,56.186) 123.642,56.186 124.618,57.162 J7.18
NetJ7_19: J7.19 LCD-MODULE.8 | length 26
  Top Layer, Top w0.254: v1(133.54,53.011) 138.666,53.011 145.143,59.488 147.256,59.488 LCD-MODULE.8@148.526,60.758 ; LCD-MODULE.8 LCD-MODULE.8@148.526,60.875
  Bottom Layer, Bottom w0.254: J7.19 128.602,56.662 129.889,56.662 v1(133.54,53.011)
NetJ7_20: J7.20 LCD-MODULE.9 | length 32.4
  Top Layer, Top w0.254: v1(123.253,55.043) 130.111,55.043 132.905,52.249 142.569,52.249 143.884,53.564 143.884,56.174 LCD-MODULE.9
  Bottom Layer, Bottom w0.254: v1(123.253,55.043) 123.761,55.043 124.88,56.162 J7.20
NetJ7_21: J7.21 LCD-MODULE.10 | length 27.3
  Top Layer, Top w0.254: v1(133.667,51.233) 142.195,51.233 145.335,54.373 146.911,54.373 147.256,54.718 147.256,57.006 LCD-MODULE.10
  Bottom Layer, Bottom w0.254: J7.21 128.73,55.662 133.159,51.233 v1(133.667,51.233)
NetR1_2: R1.2 U2.7 | length 88.1
  Bottom Layer, Bottom w0.23: R1.2 14.805,14.6 34.175,14.6 40.125,20.55 55.525,20.55 62.125,13.95 86.8,13.95 90.792,17.942 90.792,19.628 U2.7
NetR2_2: R2.2 U2.8 | length 67
  Bottom Layer, Bottom w0.23: R2.2 31.347,19.197 33.325,21.175 55.975,21.175 62.55,14.6 86.175,14.6 89.598,18.023 U2.8
NetR3_1: R3.1 S1.1 S1.2 U1.8 | length 75
  Top Layer, Top w0.254: S1.1 S1.2 11.484,53.066 R3.1
  Bottom Layer, Bottom w0.254: S1.2 16.857,44.9 61.1,44.9 62.459,43.541 U1.8
NetR4_1: R4.1 S2.1 S2.2 U1.7 | length 63.5
  Top Layer, Top w0.254: R4.1 15.61,53.066 S2.1 S2.2
  Bottom Layer, Bottom w0.254: S2.2 32.182,45.575 62.125,45.575 64.4,43.3 64.4,34.8 63.925,34.325 62.513,34.325 U1.7
NetR5_1: R5.1 S3.1 S3.2 U1.6 | length 50.1
  Top Layer, Top w0.254: R5.1 31.712,53.066 S3.1 S3.2
  Bottom Layer, Bottom w0.254: S3.2 47.232,46.525 62.75,46.525 64.95,44.325 64.95,33.975 63.976,33.001 U1.6
NetR6_1: R6.1 S4.1 S4.2 U1.5 | length 46.3
  Top Layer, Top w0.254: R6.1 47.565,53.066 S4.1 S4.2
  Bottom Layer, Bottom w0.254: S4.1 S4.2 62.134,53.066 65.491,49.709 65.491,32.741 64.481,31.731 U1.5
NetR7_1: R7.1 S5.1 S5.2 U1.4 | length 65.2
  Top Layer, Top w0.254: S5.2 S5.1 11.335,35.916 R7.1@11.344,35.907
  Bottom Layer, Bottom w0.254: S5.1 12.007,32.6 58.025,32.6 60.164,30.461 U1.4
NetR8_1: R8.1 S6.1 S6.2 U1.3 | length 49.7
  Top Layer, Top w0.254: R8.1 15.603,35.916 S6.2 S6.1 29.206,31.4 v1(44.65,31.4)
  Bottom Layer, Bottom w0.254: v1(44.65,31.4) 58.15,31.4 60.359,29.191 U1.3
NetR9_1: R9.1 S8.1 S8.2 U1.1 | length 26.1
  Top Layer, Top w0.23: R9.1 47.558,35.916 S8.2 S8.1 61.109,35.916 62.325,34.7 v1@62.325,25.4
  Bottom Layer, Bottom w0.23: v1(62.305,25.158) 62.305,26.497 U1.1
NetR10_1: R10.1 S7.1 S7.2 U1.2 | length 35.7
  Top Layer, Top w0.23: R10.1 31.705,35.916 S7.2 S7.1 43.959,35.916 46.447,33.428 v1(46.447,30.474)
  Bottom Layer, Bottom w0.23: v1@46.5,30.425 57.9,30.425 60.404,27.921 U1.2
NetR11_1: R11.1 S9.1 S9.2 U2.6 | length 104
  Top Layer, Top w0.254: R11.1@15.594,27.846 15.675,27.765 S9.1 21.441,27.765 ; v1@21.441,13.716 21.441,27.765 ; S9.2 21.441,27.765
  Bottom Layer, Bottom w0.254: v1(21.448,13.441) 36.23,13.441 40.57,17.78 42.832,20.042 54.993,20.042 61.71,13.325 89.2,13.325 92.138,16.263 U2.6
NetR12_1: R12.1 S10.1 S10.2 U2.5 | length 79.1
  Top Layer, Top w0.23: R12.1 31.731,27.765 S10.1 S10.2 42.825,25.631 v1@42.825,17.856
  Bottom Layer, Bottom w0.23: v1@42.825,17.825 42.825,17.925 44.475,19.575 54.8,19.575 61.517,12.858 90.458,12.858 93.408,15.808 U2.5
  other v1: 42.794,17.856
NetR13_1: R13.1 S11.1 S11.2 U2.4 | length 94.7
  Top Layer, Top w0.254: v1@39.632,12.25 59.175,12.25 v1(59.188,12.263) ; v1@42.35,14.95 48.3,20.9 52.175,20.9 53.441,22.166 53.441,27.765 ; R13.1 47.584,27.765 S11.1 53.441,27.765 ; S11.2 53.441,27.765
  Bottom Layer, Bottom w0.254: v1(39.632,12.252) 39.65,12.252 v1(42.383,14.985) ; v1(59.188,12.263) 59.926,11.525 92.075,11.525 94.678,14.128 U2.4
NetR14_1: R14.1 S12.1 S12.2 U2.3 | length 35.5
  Top Layer, Top w0.254: S12.2 80.618,8.391 R14.1
  Bottom Layer, Bottom w0.254: S12.1 S12.2 80.218,10.7 93,10.7 95.948,13.648 U2.3
NetR15_1: R15.1 S13.1 S13.2 U2.2 | length 22
  Top Layer, Top w0.254: S13.2 96.618,8.391 R15.1
  Bottom Layer, Bottom w0.254: S13.1 S13.2 97.218,11.7 U2.2
NetR16_1: R16.1 S14.1 S14.2 U2.1 | length 22.6
  Top Layer, Top w0.254: S14.2 112.618,8.391 R16.1
  Bottom Layer, Bottom w0.254: U2.1 98.488,13.262 103.25,8.5 109.8,8.5 S14.2
NetR29_1: R29.1 S23.1 S23.2 U3.1 | length 84.8
  Top Layer, Top w0.23: v1(134.959,24.941) 138.153,24.941 138.753,25.541 v1(138.759,25.541) ; R29.1 S23.1@154.709,72.691 ; S23.1 S23.2
  Bottom Layer, Bottom w0.23: U3.1 121.604,20.341 121.804,20.541 126.159,20.541 130.559,24.941 v1(134.959,24.941) ; v1(138.759,25.541) 142.559,29.341 142.559,34.141 145.21,36.791 149.009,36.791 151.44,39.223 151.44,68.922 S23.1
NetR30_1: R30.1 S22.1 S22.2 U3.2 | length 105.2
  Top Layer, Top w0.23: v1(134.959,23.541) 138.626,23.541 v1(138.634,23.532) ; R30.1 170.609,72.691 S22.1 S22.2
  Bottom Layer, Bottom w0.23: U3.2 120.334,18.483 120.977,17.841 122.26,17.841 124.359,19.941 126.559,19.941 130.159,23.541 v1(134.959,23.541) ; v1(138.634,23.532) 143.359,28.258 143.359,32.541 144.959,34.141 150.159,34.141 151.975,35.957 151.975,67.875 154.025,69.925 168.443,69.925 S22.1
NetR31_1: R31.1 S21.1 S21.2 U3.3 | length 124.1
  Top Layer, Top w0.23: v1(135.355,20.841) 138.184,20.841 v1@140.459,23.116 ; R31.1 186.609,72.691 S21.1 S21.2
  Bottom Layer, Bottom w0.23: U3.3 119.064,18.236 120.159,17.141 122.159,17.141 124.434,19.416 126.934,19.416 128.384,20.866 v1@135.359,20.866 ; v1(140.49,23.155) 144.209,26.875 144.209,30.816 145.009,31.616 150.209,31.616 152.55,33.957 152.55,67.875 154.15,69.475 183.993,69.475 S21.1
NetR32_1: R32.1 S20.1 S20.2 U3.4 | length 84.7
  Top Layer, Top w0.23: R32.1 186.868,8.35 S20.1
  Bottom Layer, Bottom w0.23: U3.4 117.794,16.906 119.959,14.741 160.234,14.741 162.975,12 183.3,12 S20.1 S20.2
NetR33_1: R33.1 S19.1 S19.2 U3.5 | length 69.8
  Top Layer, Top w0.23: S19.2 180.159,8.391 R33.1@180.3,8.25
  Bottom Layer, Bottom w0.23: U3.5 116.524,17.376 119.559,14.341 159.634,14.341 162.475,11.5 167.8,11.5 S19.1 S19.2
NetR34_1: R34.1 S18.1 S18.2 U3.6 | length 57
  Top Layer, Top w0.23: S18.2 164.359,8.391 R34.1
  Bottom Layer, Bottom w0.23: U3.6 115.254,17.446 118.759,13.941 152.609,13.941 154.909,11.641 S18.1 S18.2
NetR35_1: R35.1 S17.1 S17.2 U3.7 | length 36.2
  Top Layer, Top w0.23: S17.2 144.618,8.391 R35.1
  Bottom Layer, Bottom w0.23: U3.7 113.984,18.116 118.559,13.541 130.259,13.541 S17.1 S17.2
NetR36_1: R36.1 S16.1 S16.2 U3.8 | length 23.3
  Top Layer, Top w0.23: S16.2 128.618,8.391 R36.1
  Bottom Layer, Bottom w0.23: U3.8 112.714,18.586 119.409,11.891 S16.1 S16.2
NetS24_1: S24.1 S24.2 | length 6.5
  Bottom Layer, Bottom w2: S24.2 S24.1
NetS24_3: S24.3 S24.4 | length 6.5
  Bottom Layer, Bottom w2: S24.3 S24.4
NetS25_1: S25.1 S25.2 | length 6.5
  Bottom Layer, Bottom w2: S25.2 S25.1
NetS25_3: S25.3 S25.4 | length 6.5
  Bottom Layer, Bottom w2: S25.3 S25.4
NetS26_1: S26.1 S26.2 | length 6.5
  Bottom Layer, Bottom w2: S26.2 S26.1
NetS26_3: S26.3 S26.4 | length 6.5
  Bottom Layer, Bottom w2: S26.3 S26.4
NetS27_1: S27.1 S27.2 | length 6.5
  Bottom Layer, Bottom w1.5: S27.2 S27.1
NetS27_3: S27.3 S27.4 | length 6.5
  Bottom Layer, Bottom w1.5: S27.3 S27.4
SD_CS: J7.34 R25.2 | length 112.9
  Top Layer, Top w0.254: v1(112.097,49.172) 122.895,49.172 v1(122.899,49.168)
  Top Layer, Top w0.4: v1(19.25,57.55) 19.25,56.75 v1(21,55)
  Bottom Layer, Bottom w0.254: v1(21,55) 59.45,55 60.15,54.3 70.55,54.3 71.65,55.4 102.1,55.4 104,53.5 107.77,53.5 v1(112.097,49.172) ; v1(122.899,49.168) 127.296,49.168 J7.34
VCC12_IN: ACCUM.2 Q1.3 R26.2 R27.2 T1.LCP | length 19.2
  Bottom Layer, Bottom w0.381: R27.2 R26.2 47.892,62.625 47.892,67.299 T1.LCP@48.061,67.467 ; Q1.3@52.26,67.467 52.87,66.858 Q1.3 Q1.3@52.712,67.467
  Bottom Layer, Bottom w2: T1.LCP@48.061,67.467 Q1.3@52.26,67.467 ; ACCUM.2 Q1.3@52.26,67.467 ; Q1.3@52.712,67.467 Q1.3@52.26,67.467
pads on no net: ENC2.6 ENC2.7 ESP-8266.2 ESP-8266.3 ESP-8266.7 J2.1 J2.8 J2.MP3 LCD-MODULE.23 LCD-MODULE.24 LCD-MODULE.25 LCD-MODULE.27 LCD-MODULE.28 LCD-MODULE.29 LCD-MODULE.30 LCD-MODULE.31 LCD-MODULE.32 LCD-MODULE.33 LCD-MODULE.34 LCD-MODULE.37 R1.4 R1.5 R2.4 R2.5
copper on no net:
  other v3: 61.48,21.573 147.38,21.573 61.48,71.992 147.38,71.992

## Polygon pours and split planes (outlines as drawn)
GND on Top Layer, Top "Top Layer, Top-GND" (solid, remove dead copper, pour order 0): 0,77.107 200,77.107 200,0 0,0
GND on Bottom Layer, Bottom "Bottom Layer, Bottom-GND" (solid, remove dead copper, pour order 2): 0,77.107 200,77.107 200,0.07 0,0.07

## Keep-outs
Keep-Out Layer, Board:
  lines w0.2: 0,0 0,75.757 0,77.141 6.159,77.141 200,77.141 200,0 6.159,0 0,0
  lines w0.254: 164.154,31.723 ccw(c174.15,32.625) 173.244,22.629 ; 164.155,33.502 cw(c174.15,32.625) 173.204,42.613 ; 165.127,33.497 cw(c174.15,32.625) 173.204,41.641 ; 165.135,31.714 ccw(c174.15,32.625) 173.248,23.609 ; 173.225,41.675 173.225,42.6 ; 173.25,22.65 173.25,23.6 ; 174.999,41.661 cw(c174.15,32.625) 183.184,33.494 ; 175,22.65 175,23.6 ; 175,41.675 175,42.6 ; 175.004,42.625 cw(c174.15,32.625) 184.151,33.473 ; 175.014,22.629 ccw(c174.15,32.625) 184.143,31.726 ; 175.023,23.597 ccw(c174.15,32.625) 183.175,31.725 184.125,31.725 ; 183.2,33.475 184.15,33.475

## Silkscreen, mask and mechanical layers (free items; w line width, h text height)
Top Overlay, Top Silk:
  text "+" at 28.75,68.75 h3
  text "WOLF" at 21.618,55.357 h12
  text "UA3REO Transceiver" at 69.25,14.25 h2.08
  text "FRONT-UNIT rev10" at 8.65,1.925 h1.25
Bottom Overlay, Bot Silk:
  circle w0.3: c174.15,32.625 r20
  text "+" at 28.75,73.5 h3
Bottom Solder, Bot Mask:
  lines w1.5: 2.192,23.265 8.692,23.265 ; 2.191,27.765 8.692,27.765
  lines w2: 154.854,57.868 161.354,57.868 ; 154.909,62.35 161.409,62.35 ; 170.854,62.318 177.354,62.318 ; 170.979,57.893 177.479,57.893 ; 186.929,57.868 193.429,57.868 ; 186.929,62.418 193.429,62.418

## Text inside footprints (layer, text, board x,y; h text height)
ENCODER_MAIN: Mechanical 2, Bot Assy "BOARD EDGE" at 155.556,19.007 h0.42
ESP-8266: Bottom Overlay, Bot Silk "ESP-01" at 87.643,46.951 h1.67 r90; Bottom Overlay, Bot Silk "ESP8266" at 82.863,47.724 h1.67 r90
LCD-MODULE: Top Overlay, Top Silk "3'2 480*320" at 99.25,39.734 h1.67